# EAGLE board LiFePo4 Charger Single to Chain 3.2 SMD -- Finished (EAGLE 6.2)
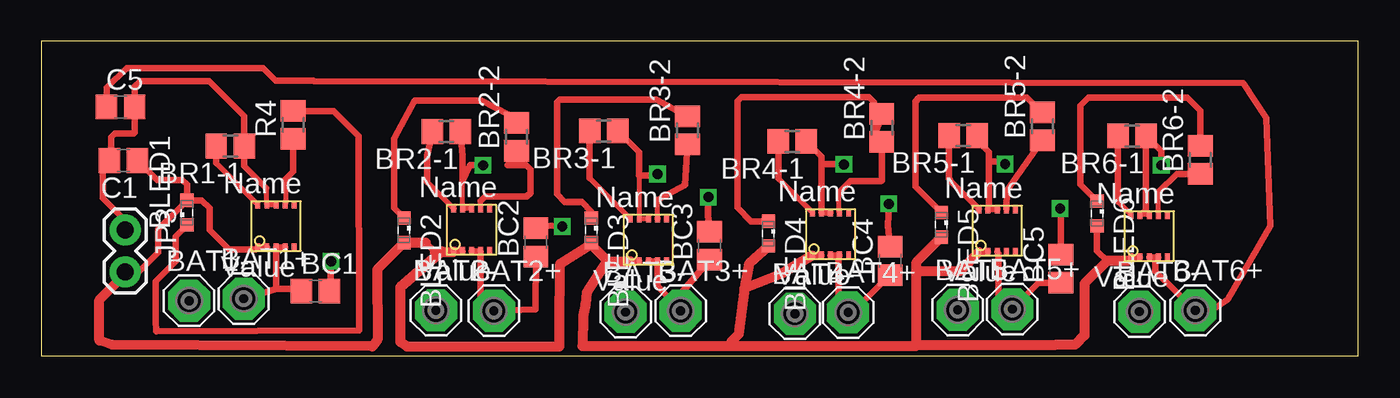
[diagram p0: board, top side]
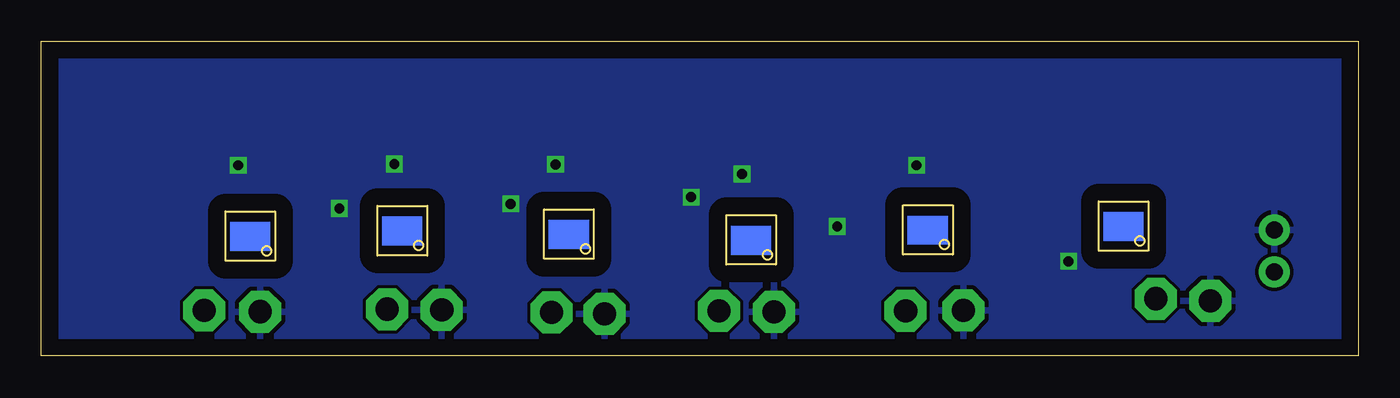
[diagram p1: board, bottom side, seen from below]

Size 79.68 x 19.04 mm. Coordinates in mm from the lower left corner, seen from the top.
Outline: 0,0 79.68,0 79.68,19.04 0,19.04 0,0
Copper layers (1*16): Top 0.035mm / dielectric 1.5mm / Bottom 0.035mm
Design rules: minimum track width 10mil, minimum drill 24mil, track to track 8mil, track to pad 8mil, pad to pad 8mil, via to via 8mil, smd to smd 8mil, copper to edge 40mil, drill to drill 8mil, minimum pad ring 10mil, minimum via ring 8mil, stop-mask expansion 4mil, vias tented up to drill 0mil, thermal gap 10mil
Net classes: 0 default: width 0.025 mm, drill 0.025 mm, clearance 0.025 mm

## Footprints (pad centres in the part's own frame; a part is rotated, then mirrored left to right if it is on the bottom)
SE14 = drill 1.397 pad 2.54 octagon: MP 0,0
C0805 = smd 1.3 x 1.5: 1 -0.85,0; 2 0.85,0
SML0603 = smd 0.8 x 0.8: A 0.75,0; C -0.75,0
R0805 = smd 1.3 x 1.5: 1 -0.85,0; 2 0.85,0
MCP73123/223 = smd 0.5 x 0.3: 1 1.47,-1.67; 2 1.47,-2.22; 3 1.47,-2.77; 4 1.47,-3.32; 5 1.47,-3.87; 6 4.07,-3.87; 7 4.07,-3.32; 8 4.07,-2.77; 9 4.07,-2.22; 10 4.07,-1.67
1X02 = drill 1.016 pad 1.88: 1 0,0; 2 2.54,0

## Placement (x,y rotation side)
BAT1+  SE14  [SE14]  12.24,3.45 0 top
BAT1-  SE14  [SE14]  8.94,3.33 0 top
BAT2+  SE14  [SE14]  27.38,2.72 0 top
BAT2-  SE14  [SE14]  23.88,2.74 0 top
BAT3+  SE14  [SE14]  38.68,2.72 0 top
BAT3-  SE14  [SE14]  35.36,2.64 0 top
BAT4+  SE14  [SE14]  48.82,2.62 0 top
BAT4-  SE14  [SE14]  45.59,2.54 0 top
BAT5+  SE14  [SE14]  58.75,2.82 0 top
BAT5-  SE14  [SE14]  55.45,2.77 0 top
BAT6+  SE14  [SE14]  69.82,2.74 0 top
BAT6-  SE14  [SE14]  66.45,2.67 0 top
BC1  4.7  [C0805]  16.59,3.91 0 top
BC2  4.7  [C0805]  29.92,6.86 90 top
BC3  4.7  [C0805]  40.44,6.65 90 top
BC4  4.7  [C0805]  51.36,5.74 90 top
BC5  4.7  [C0805]  61.7,5.26 90 top
BLED1  3.2v  [SML0603]  8.81,8.66 90 top
BLED2  3.2v  [SML0603]  21.95,7.59 270 top
BLED3  3.2v  [SML0603]  33.27,7.59 270 top
BLED4  3.2v  [SML0603]  43.99,7.39 270 top
BLED5  3.2v  [SML0603]  54.46,7.92 270 top
BLED6  3.2v  [SML0603]  63.88,8.61 270 top
BR1-1  1.5k  [R0805]  11.43,12.7 180 top
BR2-1  1.5k  [R0805]  24.51,13.56 180 top
BR2-2  1k  [R0805]  28.75,13.26 90 top
BR3-1  1.5k  [R0805]  34.04,13.61 180 top
BR3-2  1k  [R0805]  39.09,13.64 90 top
BR4-1  1.5k  [R0805]  45.44,12.98 180 top
BR4-2  1k  [R0805]  50.85,13.79 90 top
BR5-1  1.5k  [R0805]  55.78,13.34 180 top
BR5-2  1k  [R0805]  60.58,13.89 90 top
BR6-1  1.5k  [R0805]  65.99,13.31 180 top
BR6-2  1k  [R0805]  70.13,11.86 90 top
C1  4.7  [C0805]  4.98,11.81 180 top
C5  4.7  [C0805]  4.8,15.06 0 top
IC2  MCP73123/223  [MCP73123/223]  23.27,4.85 90 top
IC4  MCP73123/223  [MCP73123/223]  44.98,4.6 90 top
JP3  Vraw/Grnd  [1X02]  5.08,7.62 270 top
R4  1k  [R0805]  15.24,13.97 90 top
U$1  MCP73123/223  [MCP73123/223]  11.43,5.08 90 top
U$3  MCP73123/223  [MCP73123/223]  64.26,4.47 90 top
U$5  MCP73123/223  [MCP73123/223]  33.96,4.24 90 top
U$8  MCP73123/223  [MCP73123/223]  55.07,4.8 90 top

## Library data of the parts
BAT1+ BAT1- BAT2+ BAT2- BAT3+ BAT3- BAT4+ BAT4- BAT5+ BAT5- BAT6+ BAT6- = solpad
BC1-BC5 BR1-1 BR2-1 BR2-2 BR3-1 BR3-2 BR4-1 BR4-2 BR5-1 BR5-2 BR6-1 BR6-2 C1 C5 R4 = resistor
BLED1-BLED6 = led
IC2 IC4 U$1 U$3 U$5 U$8 = untitled
JP3 = SparkFun

## Nets
BC6: BAT6+.MP C5.1 U$3.3 U$3.4
BR1-2: R4.1 U$1.7
GND: BAT1-.MP BAT2-.MP BAT3-.MP BAT4-.MP BAT5-.MP BAT6-.MP BC1.2 BC2.2 BC3.2 BC4.2 BC5.2 BR1-1.1 BR2-1.1 BR3-1.1 BR4-1.1 BR5-1.1 BR6-1.1 C1.2 C5.2 IC2.8 IC2.9 IC4.8 IC4.9 JP3.1 U$1.8 U$1.9 U$3.8 U$3.9 U$5.8 U$5.9 U$8.8 U$8.9
N$1: BLED1.A BLED2.A BLED3.A BLED4.A BLED5.A BLED6.A C1.1 IC2.1 IC2.2 IC4.1 IC4.2 JP3.2 U$1.1 U$1.2 U$3.1 U$3.2 U$5.1 U$5.2 U$8.1 U$8.2
N$3: BAT5+.MP BC5.1 U$8.3
N$4: BR5-1.2 U$8.10
N$6: BLED5.C BR5-2.2
N$7: BR5-2.1 U$8.7
N$8: BAT1+.MP BC1.1 U$1.3 U$1.4
N$11: BR1-1.2 U$1.10
N$12: BAT2+.MP BC2.1 IC2.3 IC2.4
N$13: BLED1.C R4.2
N$15: BR2-2.1 IC2.7
N$16: BR2-1.2 IC2.10
N$17: BLED2.C BR2-2.2
N$20: BR6-2.1 U$3.7
N$21: BR6-1.2 U$3.10
N$22: BLED6.C BR6-2.2
N$24: BAT3+.MP BC3.1 U$5.3 U$5.4
N$26: BR3-2.1 U$5.7
N$27: BR3-1.2 U$5.10
N$28: BLED3.C BR3-2.2
N$30: BAT4+.MP BC4.1 IC4.3 IC4.4
N$32: BR4-2.1 IC4.7
N$33: BR4-1.2 IC4.10
N$34: BLED4.C BR4-2.2

## Tracks (layer width: path | path; a pad name or v marks a point on that pad's centre or on a via)
BC6
  Top 0.406: C5.1 3.95,16.22 5.16,17.42 13.41,17.42 14.17,16.66 16.46,16.66 16.51,16.61 72.72,16.51 74.12,14.38 74.37,7.85 71.81,3.4 70.26,2.34 69.9,2.54 BAT6+.MP 67.4,5.11 67.4,5.76 U$3.4 U$3.3
BR1-2
  Top 0.305: 14.78,10.69 14.78,9.18 U$1.7
  Top 0.406: R4.1 15.24,11.15 14.78,10.69
GND  (via drill 0.6)
  Top 0.305: 13.61,10.16 13.61,9.19 U$1.9 U$1.8 | IC2.8 IC2.9 25.49,10.59 | 36.18,10.92 U$5.9 U$5.8 | U$3.8 U$3.9 66.84,8.9
  Top 0.406: 13.61,10.16 12.28,11.49 BR1-1.1 12.28,14.52 10.16,16.64 5.97,16.64 5.65,16.32 C5.2 5.65,13.5 5.59,13.44 4.45,13.44 4.24,13.23 4.24,11.92 C1.2 3.71,11.39 3.71,9.55 5.08,8.18 JP3.1 | BC1.2 17.5,4.8 v17.53,5.71 | BR2-1.1 25.49,12.07 25.49,10.59 25.94,11.53 v26.72,11.53 | BC2.2 30.45,7.9 v31.52,7.82 | BR3-1.1 36.18,12.32 36.18,10.92 37.21,10.92 v37.29,11 | BC3.2 40.35,8.51 v40.36,9.6 | IC4.8 IC4.9 47.2,11.61 | BR4-1.1 47.2,12.07 47.2,11.61 | BC4.2 51.22,7.9 v51.28,9.2 | U$8.8 U$8.9 57.33,8.91 57.33,11.76 | 57.33,11.76 57.33,12.32 56.63,13.02 BR5-1.1 | v48.56,11.58 48.54,11.61 47.2,11.61 | v58.32,11.61 58.17,11.76 57.33,11.76 | v61.65,8.91 61.7,8.87 BC5.2 | 66.84,8.9 BR6-1.1 67.77,12.38 v67.77,11.53
  pour Bottom: 0,0 -0.08,18.14 78.66,18.14 78.74,0
N$1
  Top 0.406: U$1.2 U$1.1 12.98,6.43 11.38,6.43 10.19,7.62 10.19,8.94 9.71,9.41 BLED1.A | 5.18,4.98 JP3.2 | 23.25,6.84 23.82,6.27 | 24.89,6.27 IC2.1 IC2.2 24.23,6.32 | 33.27,6.73 BLED3.A | U$5.1 U$5.2 36.15,5.74 34.24,5.74 | IC4.2 IC4.1 | 52.91,0.58 52.91,0.53 52.96,0.58 52.96,0.66 | U$8.2 U$8.1 | U$3.2 U$3.1 65.73,5.74 | 64.49,5.74 63.88,6.35 BLED6.A | 61.39,0.66 61.39,0.69 | C1.1 7,10.64 8.53,10.64 8.81,10.36 BLED1.A | BLED1.A 7.06,7.66 7.06,6.25 5.89,5.08 JP3.2 | 41.78,0.89 41.78,0.58 | 41.53,0.58 41.48,0.58 | 5.08,4.95 JP3.2
  Top 0.61: 23.25,6.84 BLED2.A 20.32,5.22 20.34,0.96 20.04,0.56 4.27,0.66 3.5,0.91 3.5,3.38 5.08,4.95 | 23.82,6.27 24.89,6.27 | 24.23,6.32 21.72,4.14 21.72,0.84 22.12,0.56 31.34,0.56 31.34,1.65 31.39,5.56 33.27,6.73 34.29,5.71 U$5.1 | 34.24,5.74 32.99,3.81 32.92,3.12 32.79,2.41 32.74,0.58 41.48,0.58 | BLED4.A 42.82,5.58 42.55,4.06 | 42.55,4.06 42.19,1.29 41.78,0.89 | IC4.1 44.78,4.95 42.55,4.06 | BLED5.A 52.96,5.68 52.96,5.11 | 41.53,0.58 41.78,0.58 52.91,0.58 | 52.96,5.11 52.96,0.66 61.39,0.66 62.56,0.66 63.12,1.22 63.12,4.37 64.49,5.74 65.73,5.74 | U$8.1 55.57,5.11 52.96,5.11
N$3
  Top 0.406: U$8.3 57.91,6.2 57.91,3.23 58.32,2.82 BAT5+.MP 60.34,4.41 BC5.1
N$4
  Top 0.406: U$8.10 54.99,10.62 54.99,10.67 54.93,10.73 BR5-1.2
N$6
  Top 0.406: BLED5.C 52.88,10.25 52.88,15.39 53.11,15.62 59.64,15.62 60.52,14.74 BR5-2.2
N$7
  Top 0.406: BR5-2.1 58.44,9.99 U$8.7
N$8
  Top 0.406: 14.2,4.04 U$1.3 U$1.4 | 14.2,4.04 BAT1+.MP | 14.2,4.04 15.43,4.04 BC1.1
N$11
  Top 0.305: 10.58,11.67 U$1.10
  Top 0.406: BR1-1.2 10.58,11.67
N$12
  Top 0.406: IC2.3 IC2.4 26.59,3.21 BAT2+.MP 29.91,2.79 BC2.1
N$13
  Top 0.406: BLED1.C 8.13,7.23 8.13,5.71 6.91,4.5 6.93,2.13 6.96,1.47 19.23,1.52 19.23,2.21 19.2,13.31 17.69,14.82 R4.2
N$15
  Top 0.305: IC2.7 26.59,9.37
  Top 0.406: 26.59,9.37 26.85,9.63 29.36,9.63 29.59,9.86 29.59,11.28 29.34,11.53 28.21,11.53 BR2-2.1
N$16
  Top 0.305: IC2.10 23.34,10.52
  Top 0.406: IC2.10 | 23.34,10.52 23.34,12.13 BR2-1.2
N$17
  Top 0.406: BR2-2.2 28.27,14.61 26.64,15.44 22.58,15.44 21.36,13.16 21.36,8.93 BLED2.C
N$20
  Top 0.305: U$3.7 67.59,9.91
  Top 0.406: 67.59,9.91 68.69,11.01 BR6-2.1
N$21
  Top 0.305: U$3.10 65.14,9.33
  Top 0.406: 65.14,9.33 BR6-1.2
N$22
  Top 0.406: BLED6.C 62.87,10.38 62.87,15.14 63.35,15.62 69.34,15.62 70.13,14.83 BR6-2.2
N$24
  Top 0.406: U$5.3 U$5.4 37.29,4.23 BAT3+.MP 37.77,2.69 BC3.1
N$26
  Top 0.305: U$5.7 37.29,9.42
  Top 0.406: U$5.7 | 37.29,9.42 38.94,10.34 BR3-2.1
N$27
  Top 0.305: U$5.10 33.19,10.76
  Top 0.406: 33.19,10.76 BR3-1.2
N$28
  Top 0.406: BR3-2.2 37.22,15.49 31.34,15.49 31.19,15.34 31.19,9.78 31.67,9.3 32.72,9.3 33.27,8.74 BLED3.C
N$30
  Top 0.406: BC4.1 48.95,2.49 BAT4+.MP 48.69,2.62 48.23,3.07 48.23,6 IC4.4 IC4.3
N$32
  Top 0.305: IC4.7 48.26,8.71 48.26,9.88
  Top 0.406: 48.26,9.88 48.95,10.57 50.8,10.57 50.85,10.62 BR4-2.1
N$33
  Top 0.305: IC4.10 44.59,10.73
  Top 0.406: 44.59,10.73 BR4-1.2
N$34
  Top 0.406: BR4-2.2 50.39,13.22 50.39,15.34 50.06,15.67 42.37,15.67 42.11,15.42 42.11,8.97 42.94,8.14 BLED4.C